# Altium PCB Base_Board.PcbDoc
Units mm, origin at the board's own origin, x right, y up, seen from the top; angles counter-clockwise.
Board outline 96 x 76 mm, 2 copper layers (Top Layer, Bottom Layer); 20 components, 36 nets, 144 pads, 18 vias.
Unrouted connection lines stored in the file: 24.
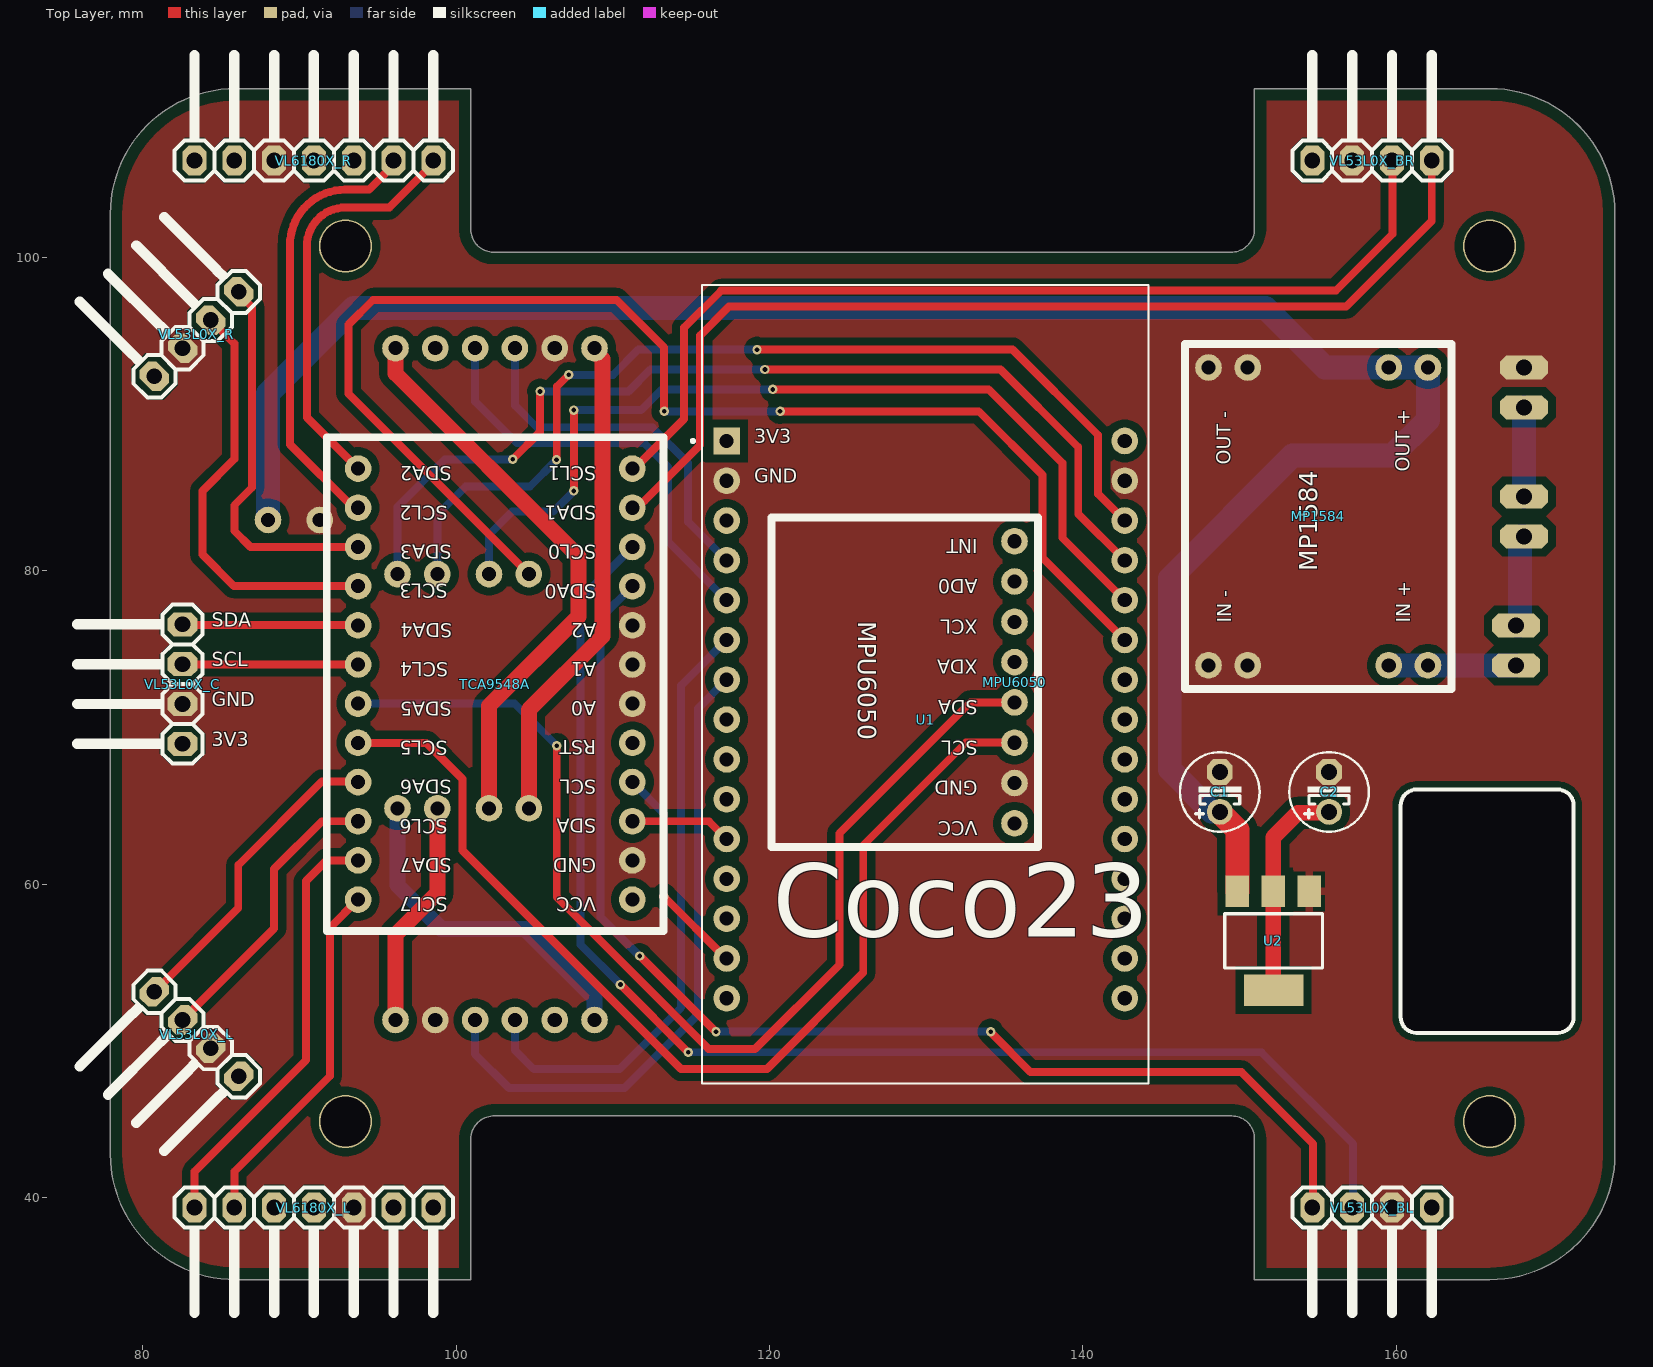
[diagram p0: Top Layer view]
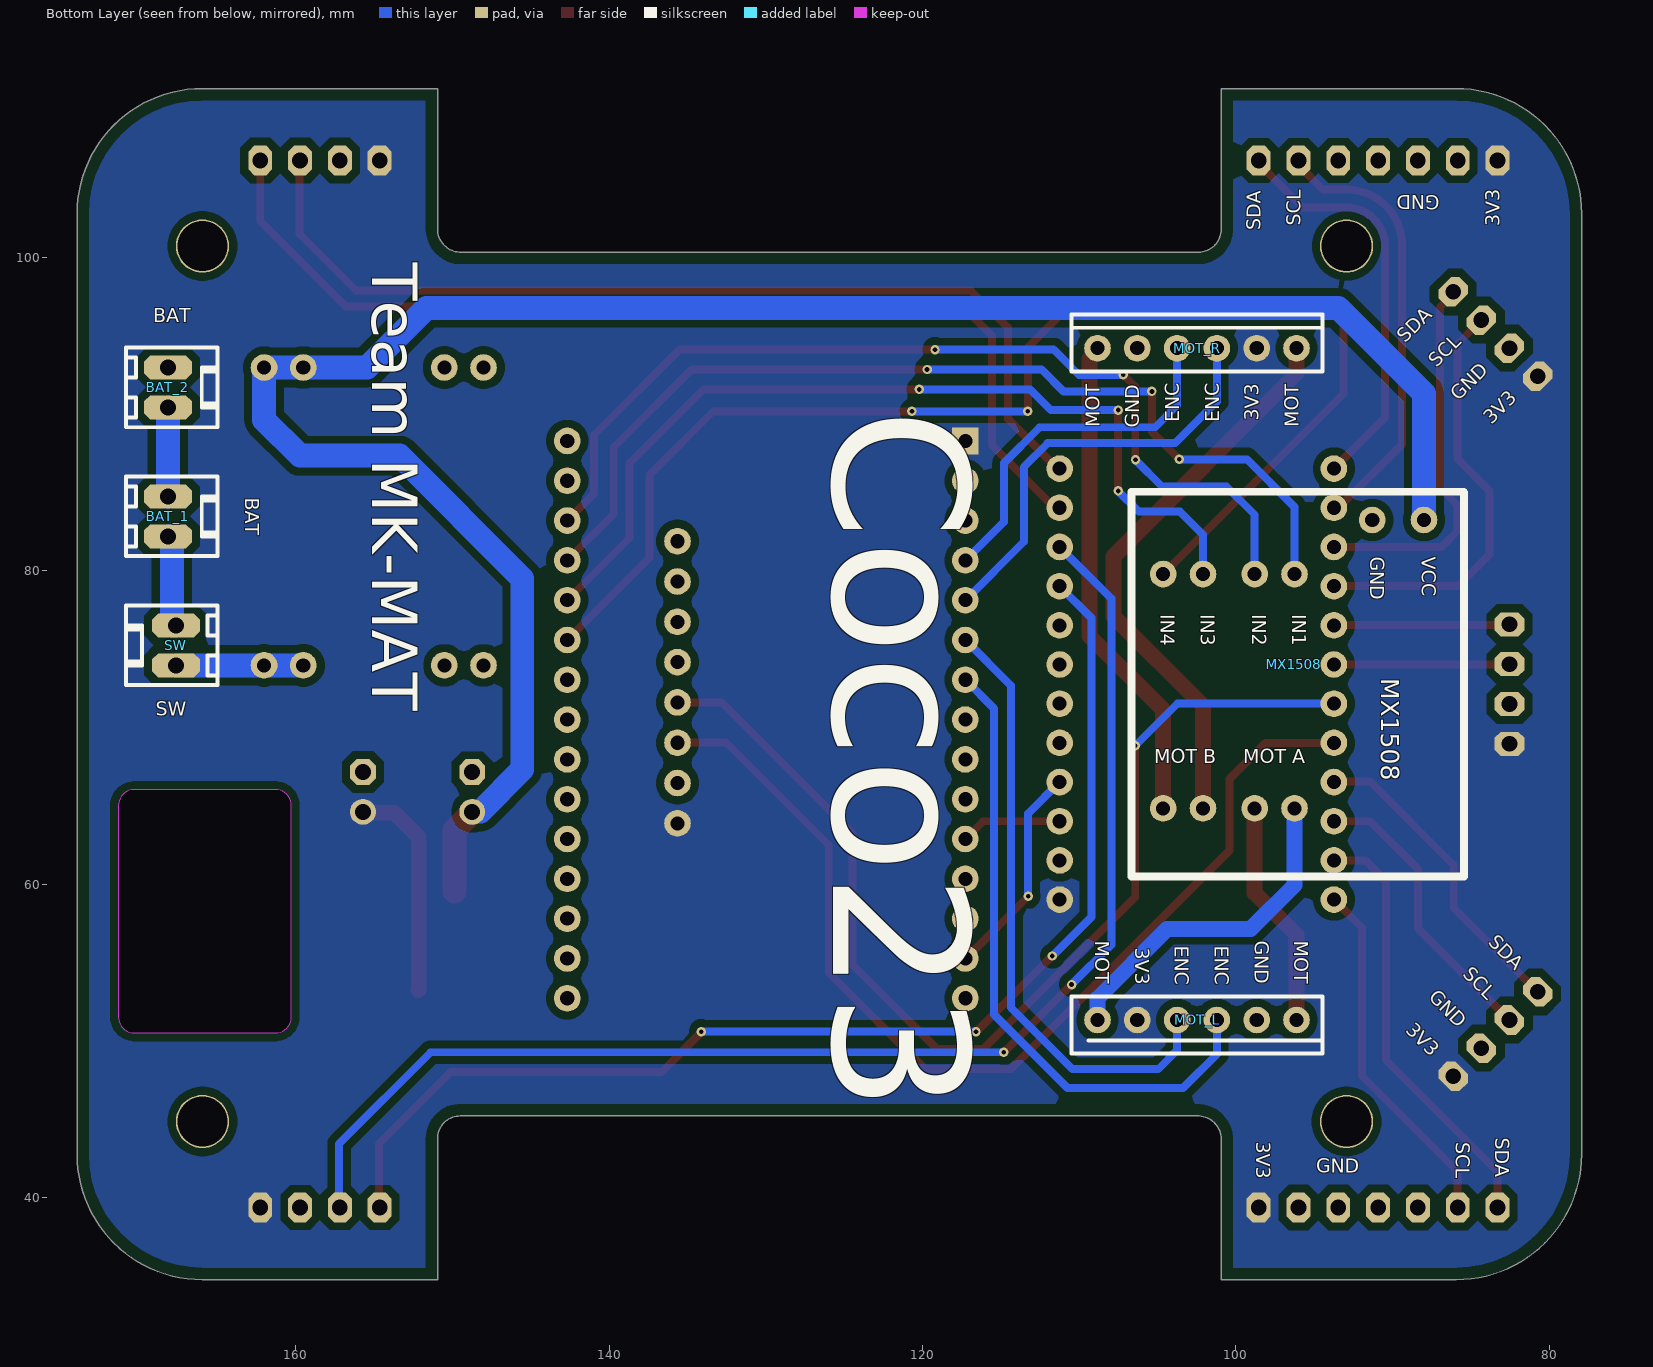
[diagram p1: Bottom Layer view, seen from below]
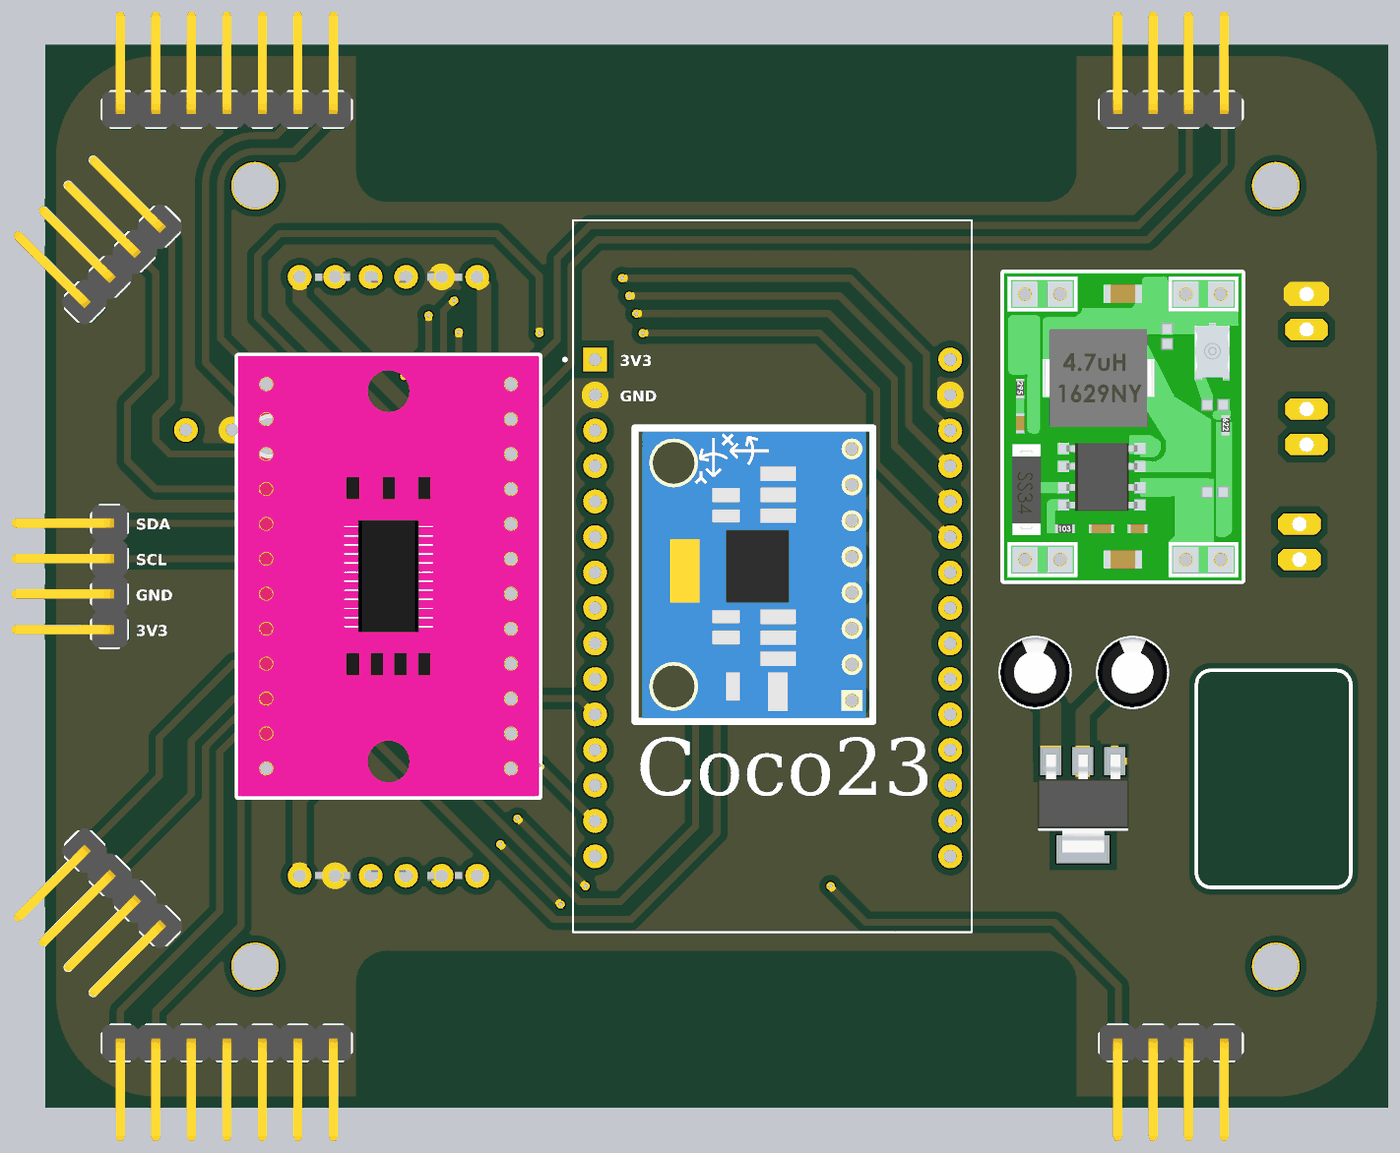
[diagram p2: 3D render of the assembled board from above, using the file's embedded part models]
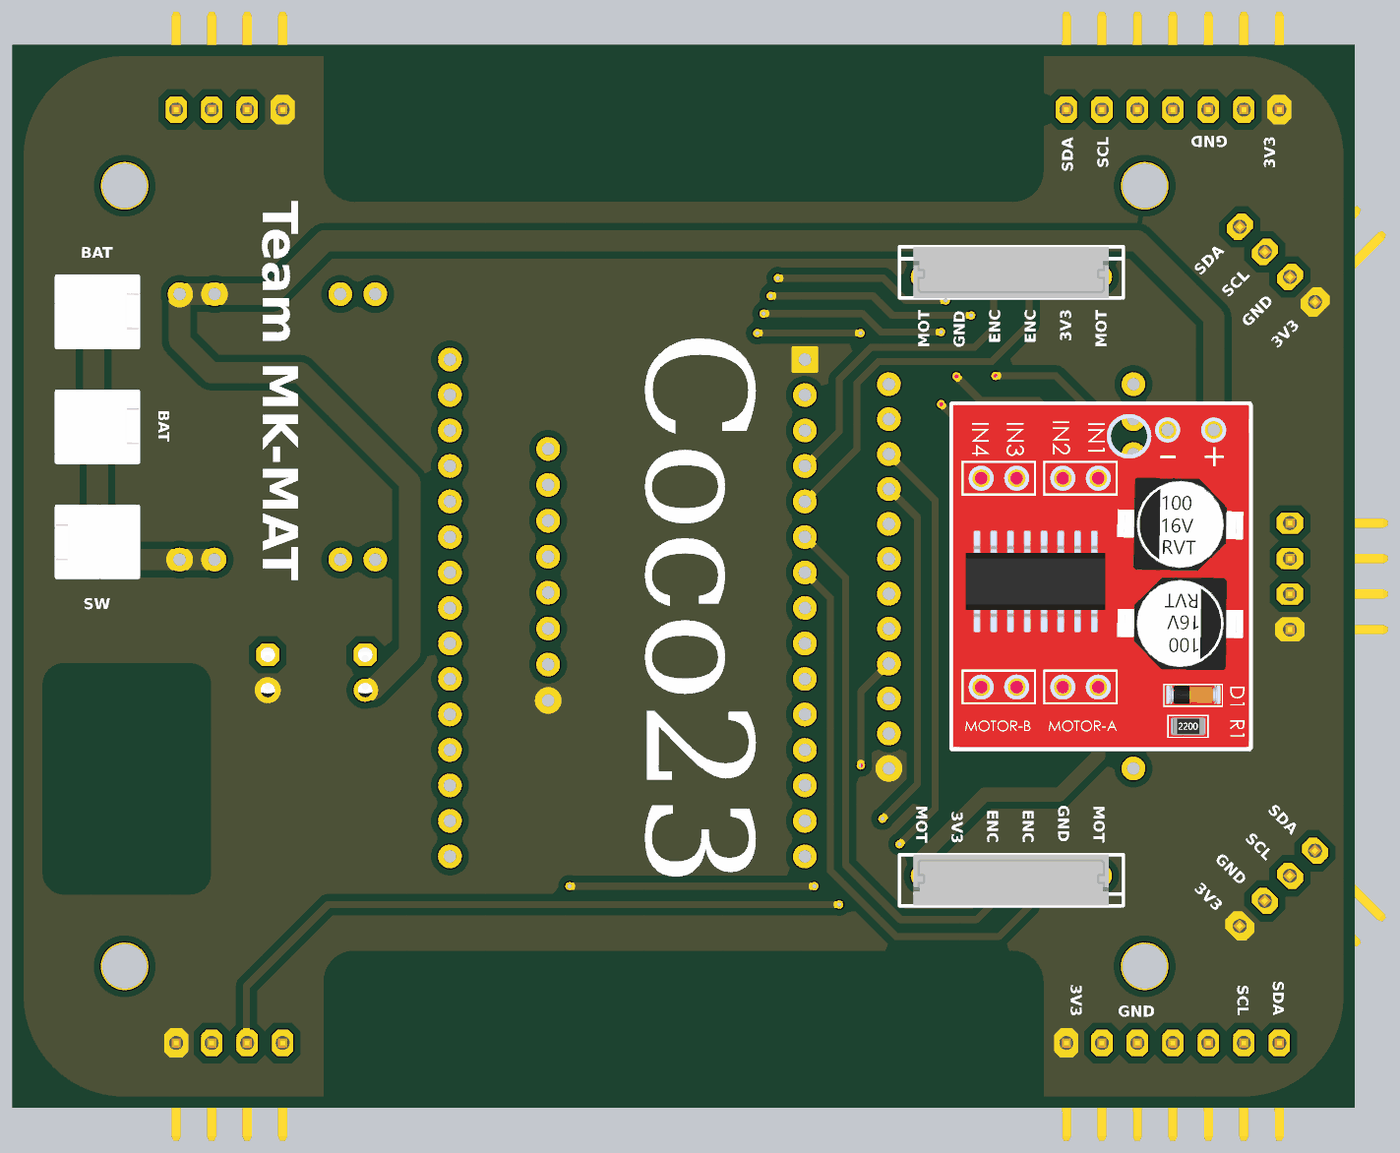
[diagram p3: 3D render of the assembled board from below, using the file's embedded part models]

## Layer stack, top to bottom
Top Solder: solder mask 0.0102, Solder Resist, Dk 3.5
Top Layer: signal copper 0.0356
Dielectric 1: dielectric 0.32, FR-4, Dk 4.8
Bottom Layer: signal copper 0.0356
Bottom Solder: solder mask 0.0102, Solder Resist, Dk 3.5

## Board outline
77.946,42.766 ccw(c85.946,42.766) 85.946,34.766 100.946,34.766 100.946,43.766 cw(c102.43,43.728) 102.468,45.212 149.5,45.212 cw(c149.5,43.766) 150.946,43.766 150.946,34.766 165.946,34.766 ccw(c165.946,42.766) 173.946,42.766 173.946,102.766 ccw(c165.946,102.766) 165.946,110.766 150.946,110.766 150.946,101.766 cw(c149.472,101.804) 149.434,100.33 102.382,100.33 cw(c102.382,101.766) 100.946,101.766 100.946,110.766 85.946,110.766 ccw(c85.946,102.766) 77.946,102.766
cut-out: 160.274,51.524 160.274,65.024 cw(c161.29,65.024) 161.29,66.04 170.29,66.04 cw(c170.29,65.024) 171.306,65.024 171.306,51.524 cw(c170.29,51.524) 170.29,50.508 161.29,50.508 cw(c161.29,51.524)
cut-out: 160.274,51.524 160.274,65.024 cw(c161.29,65.024) 161.29,66.04 170.29,66.04 cw(c170.29,65.024) 171.306,65.024 171.306,51.524 cw(c170.29,51.524) 170.29,50.508 161.29,50.508 cw(c161.29,51.524)

## Design rules (kind name [scope] priority, off if disabled: settings)
Clearance [All] p1: gap=0.508 ignorepadtopadclearanceinfootprint=TRUE
ComponentClearance [All] p1: gap=0.01 collisioncheckmode=3 verticalgap=2540 showdistances=FALSE
HoleSize [All] p1: absolutevalues=TRUE maxlimit=3.6 minlimit=0.025 maxpercent=80.000 minpercent=20.000
PolygonConnect [All] p1: thpad.connectstyle=Direct thpad.reliefconductorwidth=0.254 thpad.reliefentries=4 thpad.polygonreliefangle="90 Angle" thpad.airgapwidth=0.254 smdpad.connectstyle=Relief smdpad.reliefconductorwidth=0.508 smdpad.reliefentries=4 smdpad.polygonreliefangle="90 Angle" smdpad.airgapwidth=0.254 via.connectstyle=Direct via.reliefconductorwidth=0.254 via.reliefentries=4 via.polygonreliefangle="90 Angle" via.airgapwidth=0.254
RoutingVias [All] p1: holewidth=0.3 width=0.6 viastyle="Through Hole" minholewidth=0.3 minwidth=0.6 maxholewidth=0.3 maxwidth=0.6
SolderMaskExpansion [All] p1: expansion=0.102 istentingtop=FALSE
Width "Schematic Width Constraint_8" [InNet('MR-')] p1: maxlimit=1.016 minlimit=1.016 preferedwidth=1.016
Width "Schematic Width Constraint_7" [InNet('MR+')] p2: maxlimit=1.016 minlimit=1.016 preferedwidth=1.016
Width "Schematic Width Constraint_6" [InNet('ML-')] p3: maxlimit=1.016 minlimit=1.016 preferedwidth=1.016
Width "Schematic Width Constraint_5" [InNet('ML+')] p4: maxlimit=1.016 minlimit=1.016 preferedwidth=1.016
Width "Schematic Width Constraint_4" [InNet('NetMP1584_1')] p5: maxlimit=1.524 minlimit=1.524 preferedwidth=1.524
Width "Schematic Width Constraint_3" [InNet('NetBAT_1_2')] p6: maxlimit=1.524 minlimit=1.524 preferedwidth=1.524
Width "Schematic Width Constraint_2" [InNet('+7.4V')] p7: maxlimit=1.524 minlimit=1.524 preferedwidth=1.524
Width "Schematic Width Constraint_1" [InNet('+6V')] p8: maxlimit=1.524 minlimit=1.524 preferedwidth=1.524
Width "Schematic Width Constraint" [InNet('+3V3')] p9: maxlimit=1.016 minlimit=1.016 preferedwidth=1.016
Width [All] p10: maxlimit=0.508 minlimit=0.254 preferedwidth=0.508
28 further rules are at their usual default settings.

## Components (designator, comment, footprint, x,y, rotation, side; value= is the part's Value field where it differs from the comment)
BAT_1 "Header 2" MY_6410-02 168.148,83.464 r270 bottom
BAT_2 "Header 2" MY_6410-02 168.148,91.694 r270 bottom
C1 "10uF" MY_E2.5-5mm 148.733,65.887 r90 top
C2 "10uF" MY_E2.5-5mm 155.702,65.887 r90 top
MOT_L "Header 6" MY_53253-0670#1 107.502,51.334 r180 bottom
MOT_R "Header 6" MY_53253-0670#2 97.502,94.198 r0 bottom
MP1584 "MP1584 Mini Adjustable Buck" "MP1584 Mini Adjustable Buck-Footprint-1" 162.012,73.964 r90 top
MPU6050 "MPU6050 Accelerometer and Gyroscope Sensor" "MPU6050 Accelerometer and Gyroscope Sensor-Footprint-1" 135.636,63.882 r180 top
MX1508 "MX1508 Motor Driver" "MX1508 Motor Driver-Footprint-1" 96.266,79.787 r270 bottom
SW "Header 2" MY_6410-02 167.64,75.234 r90 bottom
TCA9548A "TCA9548A 1-to-8 I2C Multiplexer Module" "TCA9548A 1-to-8 I2C Multiplexer Module-Footprint-1" 111.252,59.016 r180 top
U1 "ESP32-DEVKIT-V1" MODULE_ESP32_DEVKIT_V1 129.966,72.766 r0 top
U2 "LM1117" MY_SOT223 152.175,56.319 r180 top
VL53L0X_BL "Header 4" MY_MA04-1W 158.446,39.37 r180 top
VL53L0X_BR "Header 4" MY_MA04-1W 158.446,106.172 r0 top
VL53L0X_C "Header 4" MY_MA04-1W 82.55,72.766 r90 top
VL53L0X_L "Header 4" MY_MA04-1W 83.448,50.436 r135 top
VL53L0X_R "Header 4" MY_MA04-1W 83.448,95.096 r45 top
VL6180X_L "Header 7" MY_MA07-1W 90.932,39.37 r180 top
VL6180X_R "Header 7" MY_MA07-1W 90.932,106.172 r0 top

## Footprints (in the part's own frame and the unit in brackets; to place one, negate y for a bottom-side part, rotate by r counter-clockwise, add the part's x,y. Pads: shape width x height; smd on the part's side, far side on the other; paste and mask are expansions set on the pad)
MODULE_ESP32_DEVKIT_V1 [mm]
  rect 1.7x1.7 hole 0.9: 1(-12.7,15.515)
  round 1.7 hole 0.9: 2(-12.7,12.975) 3(-12.7,10.435) 4(-12.7,7.895) 5(-12.7,5.355) 6(-12.7,2.815) 7(-12.7,0.275) 8(-12.7,-2.265) 9(-12.7,-4.805) 10(-12.7,-7.345) 11(-12.7,-9.885) 12(-12.7,-12.425) 13(-12.7,-14.965) 14(-12.7,-17.505) 15(-12.7,-20.045) 16(12.7,-20.045) 17(12.7,-17.505) 18(12.7,-14.965) 19(12.7,-12.425) 20(12.7,-9.885) 21(12.7,-7.345) 22(12.7,-4.805) 23(12.7,-2.265) 24(12.7,0.275) 25(12.7,2.815) 26(12.7,5.355) 27(12.7,7.895) 28(12.7,10.435) 29(12.7,12.975) 30(12.7,15.515)
  silkscreen extent -14.95,-25.48 14.23,25.48
"MP1584 Mini Adjustable Buck-Footprint-1" [mm]
  round 1.7 hole 0.9: 1(0,2.5) 1(0,0) 2(0,14) 2(0,11.5) 3(19,11.5) 3(19,14) 4(19,0) 4(19,2.5)
  silkscreen extent -1.5,-1.5 20.5,15.5, body extent -1.5,-1.5 20.5,15.5, height 3.6
"MPU6050 Accelerometer and Gyroscope Sensor-Footprint-1" [mm]
  round 1.7 hole 0.9: 1(0,0) 2(0,-2.571) 3(0,-5.143) 4(0,-7.714) 5(0,-10.286) 6(0,-12.857) 7(0,-15.429) 8(0,-18)
  silkscreen extent -1.5,-19.5 15.52,1.5, body extent -1,-19.25 15,1.25, height 3.2
"MX1508 Motor Driver-Footprint-1" [mm]
  round 1.7 hole 0.9: 1(-3.45,8.26) 2(-3.45,4.96) 3(0,0) 4(0,-2.54) 5(0,-5.84) 6(0,-8.38) 7(14.95,0) 8(14.95,-2.54) 9(14.95,-5.84) 10(14.95,-8.38)
  silkscreen extent -5.25,-10.41 19.29,10.8, body extent -5.25,-10.4 19.25,10.8, height 7.76
MY_6410-02 [mil]
  oct 60x120 hole 40: 1(50,0) 2(-50,0)
  silkscreen extent -100,-105 100,125, body extent -102,-102 99,126, height 449
MY_53253-0670#1 [mm]
  round 1.7 hole 0.9: 1(-1.335,0) 2(1.205,0) 3(3.745,0) 4(6.285,0) 5(8.825,0) 6(11.365,0)
  silkscreen extent -2.99,-2.15 13.01,1.5, body extent -2,-2.12 12,1.53, height 5.55
MY_53253-0670#2 [mm]
  round 1.7 hole 0.9: 1(-1.365,0) 2(1.175,0) 3(3.715,0) 4(6.255,0) 5(8.795,0) 6(11.335,0)
  silkscreen extent -3.01,-2.15 12.99,1.5, body extent -2,-2.12 12,1.53, height 5.55
MY_E2.5-5mm [mil]
  round 65 hole 40: +(-50,0)
  oct 65x65 hole 40: -(50,0)
  silkscreen extent -100,-100 100,100, body extent -98,-98 98,98, height 395
MY_MA04-1W [mm]
  oct 1.524x1.905 hole 1: 1(-3.81,0) 2(-1.27,0) 3(1.27,0) 4(3.81,0)
  silkscreen extent -5.08,-1.27 5.08,6.73, body extent -5.08,-1.27 5.08,7, height 4.33
MY_MA07-1W [mm]
  oct 1.524x1.905 hole 1: 1(-7.62,0) 2(-5.08,0) 3(-2.54,0) 4(0,0) 5(2.54,0) 6(5.08,0) 7(7.62,0)
  silkscreen extent -8.89,-1.27 8.89,6.73, body extent -8.89,-1.27 8.89,7, height 4.33
MY_SOT223 [mil]
  rect 59x79 smd: 1(-88.65,-126.69) 2(1.35,-126.69) 3(91.35,-126.69)
  rect 150x79 smd: 2(0.35,121.31)
  silkscreen extent -123,-71 123,65, body extent -128,-145 128,131, height 66
"TCA9548A 1-to-8 I2C Multiplexer Module-Footprint-1" [mm]
  round 1.7 hole 0.9: 1(0,0) 2(0,-2.5) 3(0,-5) 4(0,-7.5) 5(0,-10) 6(0,-12.5) 7(0,-15) 8(0,-17.5) 9(0,-20) 10(0,-22.5) 11(0,-25) 12(0,-27.5) 13(17.5,-27.5) 14(17.5,-25) 15(17.5,-22.5) 16(17.5,-20) 17(17.5,-17.5) 18(17.5,-15) 19(17.5,-12.5) 20(17.5,-10) 21(17.5,-7.5) 22(17.5,-5) 23(17.5,-2.5) 24(17.5,0)
  silkscreen extent -2,-29.5 19.5,2, body extent -2,-29.5 19.5,2, height 2.6

## Part data
BAT_1 BAT_2 SW: "Header, 2-Pin", ASiD Part Number="Header 2-AS"
C1 C2: library part "Cap Pol", "Polar capacitor", ASiD Part Number=C-AS, Volte=25v
MOT_L MOT_R: "Header, 6-Pin", ASiD Part Number="Header 6-AS"
MP1584: library part RBT-0002-2, "MP1584 Mini Adjustable DC-DC Step Down Module can step-down a 4.5 to 28V input voltage to a 0.8 to 20V output at up to 2A."
MPU6050: library part RBT-0003-2, "MPU6050 sensor module is complete 6-axis Motion Tracking Device. It combines 3-axis Gyroscope, 3-axis Accelerometer and Digital Motion Processor all in small package."
MX1508: library part RBT-0001-2, "MX1508 Dual H Bridge DC PWM Stepper Motor Driver module."
TCA9548A: library part RBT-0004-4, "An 8-channel I2C multiplexer which is useful to allow multiple I2C devices with the same address to share a single I2C bus."
U1: "Dual core, Wi-Fi: 2.4 GHz up to 150 Mbits/s,BLE (Bluetooth Low Energy) and legacy Bluetooth, 32 bits, Up to 240 MHz", Package=None, Availability=Unavailable, MF="{'manufacturer': u'Do it'}", MP=ESP32-DEVKIT-V1, Price=None
U2: "Low Drop Voltage Reg", ASiD Part Number=LM1117-AS
VL53L0X_BL VL53L0X_BR VL53L0X_C VL53L0X_L VL53L0X_R: "Header, 4-Pin", ASiD Part Number="Header 4-AS"
VL6180X_L VL6180X_R: "Header, 8-Pin, Dual row", ASiD Part Number="Header 7-AS"

## Free pads (board coordinates)
  round 3.4 hole 3.2: M1(92.946,100.714) M2(92.946,44.856) M3(165.946,100.714) M4(165.946,44.856)

## Via types
v1: diameter 0.6, hole 0.3, Top Layer to Bottom Layer, 18 vias

## Nets (pads, with @x,y where several pads share a name; then routed paths per layer and width w, separated by ;. In a path a pad name is that pad's centre, name@x,y a point inside that pad or via, vN(x,y) a via of type N, cw(c..) or ccw(c..) an arc to the next point about the centre after c; other vN are vias at no path point)
+3V3: C2.+ MOT_L.2 MOT_R.2 MPU6050.1 TCA9548A.1 U1.1 U2.2 VL53L0X_BL.1 VL53L0X_BR.1 VL53L0X_C.1 VL53L0X_L.1 VL53L0X_R.1 VL6180X_L.1 VL6180X_R.1 | length 14
  Top Layer w1.016: U2.2@152.167,53.238 152.141,53.263 152.141,59.537 152.141,62.987 153.71,64.556 155.641,64.556 C2.+
+6V: C1.+ MP1584.4 MX1508.1 U2.3 | length 131.9
  Top Layer w1.524: C1.+@148.733,64.583 149.855,63.46 U2.3
  Bottom Layer w1.524: MX1508.1 88.006,91.308 93.472,96.774 151.638,96.774 155.448,92.964 159.512,92.964 162.012,92.964 162.012,89.622 159.732,87.342 153.382,87.342 145.542,79.502 145.542,67.313 148.214,64.641 148.674,64.641 C1.+@148.698,64.617 ; C1.+@148.733,64.583 C1.+
+7.4V: BAT_1.1 SW.1 | length 6.2
  Bottom Layer w1.524: SW.1 167.894,76.504 167.894,82.194 BAT_1.1
D12: MX1508.3 U1.27 | length 63.4
  Top Layer w0.508: v1(103.62,87.11) 105.364,88.854 v1(105.364,91.44) ; v1(119.71,92.837) 134.747,92.837 139.7,87.884 139.7,83.627 U1.27
  Bottom Layer w0.508: MX1508.3 96.266,84.074 99.302,87.11 v1(103.62,87.11) ; v1(105.364,91.44) 110.998,91.44 112.395,92.837 v1(119.71,92.837)
D13: MX1508.4 U1.28 | length 61.5
  Top Layer w0.508: v1(106.413,87.075) 106.426,87.088 106.426,91.74 v1(107.188,92.502) ; v1(119.202,94.107) 135.509,94.107 140.97,88.646 140.97,84.897 U1.28
  Bottom Layer w0.508: MX1508.4 98.806,83.566 100.601,85.361 104.711,85.361 106.413,87.063 v1(106.413,87.075) ; v1(107.188,92.502) 110.028,92.502 111.633,94.107 v1(119.202,94.107)
D14: MX1508.5 U1.26 | length 58.3
  Top Layer w0.508: v1(107.521,85.09) v1(107.521,90.249) ; v1(120.218,91.567) 133.985,91.567 138.684,86.868 138.684,82.103 U1.26
  Bottom Layer w0.508: MX1508.5 102.106,82.294 103.576,83.764 106.195,83.764 v1(107.521,85.09) ; v1(107.521,90.249) 111.815,90.249 113.133,91.567 v1(120.218,91.567)
D27: MX1508.6 U1.25 | length 85.4
  Top Layer w0.508: MX1508.6 93.142,91.292 93.142,95.707 94.717,97.282 110.236,97.282 113.284,94.234 v1(113.284,90.17) ; v1(120.675,90.17) 133.35,90.17 137.414,86.106 137.414,80.833 U1.25
  Bottom Layer w0.508: MX1508.6 MX1508.6@104.679,79.787 ; v1(113.284,90.17) v1(120.675,90.17)
ENC_LA: MOT_L.3 U1.6 | length 39.3
  Bottom Layer w0.508: MOT_L.3 103.757,49.405 104.964,48.198 110.428,48.198 114.351,52.121 114.351,72.665 U1.6
ENC_LB: MOT_L.4 U1.7 | length 41.4
  Bottom Layer w0.508: MOT_L.4 101.217,49.151 103.378,46.99 110.744,46.99 115.443,51.689 115.443,71.218 U1.7
ENC_RA: MOT_R.3 U1.5 | length 27.5
  Bottom Layer w0.508: MOT_R.3 101.217,90.807 103.886,88.138 112.014,88.138 113.538,86.614 113.538,81.849 U1.5
ENC_RB: MOT_R.4 U1.4 | length 23.4
  Bottom Layer w0.508: MOT_R.4 103.757,90.553 105.156,89.154 112.522,89.154 114.808,86.868 114.808,83.119 U1.4
GND: BAT_2.2 C1.- C2.- MOT_L.5 MOT_R.5 MP1584.2 MP1584.3 MPU6050.2 MX1508.2 TCA9548A.2 TCA9548A.6 TCA9548A.7 TCA9548A.8 U1.2 U1.29 U2.1 VL53L0X_BL.2 VL53L0X_BR.2 VL53L0X_C.2 VL53L0X_L.2 VL53L0X_R.2 VL6180X_L.3 VL6180X_R.3
ML+: MOT_L.1 MX1508.7 | length 21.8
  Bottom Layer w1.016: MX1508.7 96.266,59.944 99.06,57.15 104.394,57.15 108.837,52.707 MOT_L.1
ML-: MOT_L.6 MX1508.8 | length 14.6
  Top Layer w1.016: MOT_L.6 96.137,56.767 98.806,59.436 MX1508.8
MR+: MOT_R.1 MX1508.9 | length 36.5
  Top Layer w1.016: MOT_R.1 96.137,92.585 107.823,80.899 107.823,77.089 102.106,71.372 MX1508.9@102.106,64.936
MR-: MOT_R.6 MX1508.10 | length 31.5
  Top Layer w1.016: MX1508.10 104.646,71.118 109.347,75.819 109.347,93.503 108.837,94.013 MOT_R.6
NetBAT_1_2: BAT_1.2 BAT_2.1 | length 5.7
  Bottom Layer w1.524: BAT_1.2 BAT_2.1
NetMP1584_1: MP1584.1 SW.2 | length 8.1
  Bottom Layer w1.524: MP1584.1@159.512,73.964 162.012,73.964 SW.2
SCL: TCA9548A.4 U1.14 | length 13.7
  Top Layer w0.508: v1(113.259,59.233) U1.14@117.23,55.261
  Bottom Layer w0.508: TCA9548A.4 113.259,64.509 v1(113.259,59.233)
SCL0: TCA9548A.10 VL53L0X_BL.3 | length 85.3
  Top Layer w0.508: v1(110.49,53.594) v1(114.808,49.276)
  Bottom Layer w0.508: v1(110.49,53.594) 107.95,56.134 107.95,78.214 TCA9548A.10 ; v1@114.833,49.276 151.384,49.276 157.226,43.434 157.226,39.42 VL53L0X_BL.3
SCL1: TCA9548A.12 VL53L0X_BR.3 | length 62.8
  Top Layer w0.508: TCA9548A.12 111.386,86.516 114.554,89.684 114.554,95.504 116.916,97.866 156.134,97.866 159.766,101.498 159.766,106.122 VL53L0X_BR.3
SCL2: TCA9548A.14 VL6180X_R.6 | length 28.3
  Top Layer w0.508: TCA9548A.14 93.454,84.016 89.408,88.062 89.408,100.777 cw(c92.926,100.793) 92.926,104.311 94.444,104.311 96.012,105.878 VL6180X_R.6
SCL3: TCA9548A.16 VL53L0X_R.3 | length 27.2
  Top Layer w0.508: VL53L0X_R.3 85.852,94.488 85.852,87.122 83.82,85.09 83.82,81.026 85.83,79.016 TCA9548A.16
SCL4: TCA9548A.18 VL53L0X_C.3 | length 11.2
  Top Layer w0.508: VL53L0X_C.3 82.56,74.026 93.742,74.026 TCA9548A.18
SCL5: MPU6050.3 TCA9548A.20 | length 66.6
  Top Layer w0.508: TCA9548A.20 98.116,69.016 100.418,66.714 100.418,62.142 114.346,48.214 119.842,48.214 125.984,54.356 125.984,62.484 132.525,69.025 MPU6050.3
SCL6: TCA9548A.22 VL53L0X_L.3 | length 18.7
  Top Layer w0.508: VL53L0X_L.3 88.392,57.176 88.392,60.96 91.448,64.016 TCA9548A.22
SCL7: TCA9548A.24 VL6180X_L.6 | length 22.9
  Top Layer w0.508: VL6180X_L.6 85.852,41.656 91.948,47.752 91.948,57.212 TCA9548A.24
SDA: TCA9548A.3 U1.11 | length 6.5
  Top Layer w0.508: TCA9548A.3@111.262,64.016 116.131,64.016 U1.11
SDA0: TCA9548A.9 VL53L0X_BL.4 | length 77.5
  Top Layer w0.508: v1(111.714,55.418) 111.737,55.418 116.563,50.592 v1(116.586,50.592) ; v1@134.114,50.592 134.114,50.565 134.158,50.521 134.158,50.502 136.654,48.006 150.114,48.006 154.686,43.434 154.686,39.42 VL53L0X_BL.4
  Bottom Layer w0.508: TCA9548A.9 109.22,76.984 109.22,57.912 v1(111.714,55.418) ; v1@116.611,50.592 v1(134.112,50.592)
SDA1: TCA9548A.11 VL53L0X_BR.4 | length 66.5
  Top Layer w0.508: TCA9548A.11 111.575,84.016 112.045,84.486 ; 112.045,84.486 115.57,88.011 115.57,94.996 117.424,96.85 156.794,96.85 162.256,102.312 VL53L0X_BR.4
SDA2: TCA9548A.13 VL6180X_R.7 | length 26.4
  Top Layer w0.508: TCA9548A.13 90.484,89.784 90.484,100.714 cw(c92.946,100.714) 92.946,103.176 95.746,103.176 98.552,105.981 VL6180X_R.7
SDA3: TCA9548A.15 VL53L0X_R.4 | length 24.4
  Top Layer w0.508: VL53L0X_R.4 86.142,97.656 86.995,96.803 86.995,85.319 85.852,84.176 85.852,82.55 86.886,81.516 TCA9548A.15
SDA4: TCA9548A.17 VL53L0X_C.4 | length 11.2
  Top Layer w0.508: VL53L0X_C.4 82.58,76.546 93.722,76.546 TCA9548A.17
SDA5: MPU6050.4 TCA9548A.19 | length 70.7
  Top Layer w0.508: v1(106.426,68.834) 106.426,59.182 116.124,49.484 119.08,49.484 124.46,54.864 124.46,63.246 132.811,71.597 MPU6050.4
  Bottom Layer w0.508: TCA9548A.19 103.744,71.516 v1(106.426,68.834)
SDA6: TCA9548A.21 VL53L0X_L.4 | length 20.2
  Top Layer w0.508: VL53L0X_L.4 86.106,58.482 86.106,61.214 91.44,66.548 93.72,66.548 TCA9548A.21
SDA7: TCA9548A.23 VL6180X_L.7 | length 27.6
  Top Layer w0.508: VL6180X_L.7 83.312,41.656 90.424,48.768 90.424,60.198 91.742,61.516 TCA9548A.23
pads on no net: MPU6050.5 MPU6050.6 MPU6050.7 MPU6050.8 TCA9548A.5 U1.3 U1.8 U1.9 U1.10 U1.12 U1.13 U1.15 U1.16 U1.17 U1.18 U1.19 U1.20 U1.21 U1.22 U1.23 U1.24 U1.30 VL6180X_L.2 VL6180X_L.4 VL6180X_L.5 VL6180X_R.2 VL6180X_R.4 VL6180X_R.5

## Polygon pours and split planes (outlines as drawn)
+3V3 on Bottom Layer "+3V3_L02_P001" (solid, remove dead copper, pour order 1): 77.946,42.766 ccw(c85.946,42.766) 85.946,34.766 100.946,34.766 100.946,43.69 102.468,45.212 149.5,45.212 150.946,43.766 150.946,34.766 165.946,34.766 ccw(c165.946,42.766) 173.946,42.766 173.946,102.766 ccw(c165.946,102.766) 165.946,110.766 150.946,110.766 150.946,101.842 149.434,100.33 102.382,100.33 100.946,101.766 100.946,110.766 85.946,110.766 ccw(c85.946,102.766) 77.946,102.766
GND on Top Layer "GND_L01_P002" (solid, remove dead copper, pour order 2): 77.946,42.766 ccw(c85.946,42.766) 85.946,34.766 100.946,34.766 100.946,43.69 102.468,45.212 149.5,45.212 150.946,43.766 150.946,34.766 165.946,34.766 ccw(c165.946,42.766) 173.946,42.766 173.946,102.766 ccw(c165.946,102.766) 165.946,110.766 150.946,110.766 150.946,101.842 149.434,100.33 102.382,100.33 100.946,101.766 100.946,110.766 85.946,110.766 ccw(c85.946,102.766) 77.946,102.766

## Silkscreen, mask and mechanical layers (free items; w line width, h text height)
Top Overlay:
  lines w0.254: 160.274,51.524 ccw(c161.29,51.524) 161.29,50.508 170.29,50.508 ccw(c170.29,51.524) 171.306,51.524 171.306,65.024 ccw(c170.29,65.024) 170.29,66.04 161.29,66.04 ccw(c161.29,65.024) 160.274,65.024 160.274,51.524
  text "3V3" at 119.036,87.822 h1.52
  text "GND" at 119.036,85.284 h1.52
  text "SDA" at 84.422,76.117 h1.52
  text "SCL" at 84.422,73.578 h1.52
  text "GND" at 84.422,71.039 h1.52
  text "3V3" at 84.422,68.497 h1.52
  text "Coco23" at 120.196,55.122 h8
Bottom Overlay:
  text "GND" at 86.999,104.28 h1.52 r180
  text "SCL" at 95.554,101.996 h1.52 r270
  text "3V3" at 82.853,101.964 h1.52 r270
  text "SDA" at 98.093,101.722 h1.52 r270
  text "Team MK-MAT" at 156.074,99.642 h5 r90
  text "BAT" at 169.097,95.55 h1.52
  text "SDA" at 88.963,94.264 h1.52 r315
  text "SCL" at 86.983,92.69 h1.52 r315
  text "GND" at 85.561,90.557 h1.52 r315
  text "Coco23" at 128.568,90.378 h15 r90
  text "3V3" at 98.218,89.584 h1.52 r270
  text "ENC" at 100.759,89.465 h1.52 r270
  text "ENC" at 103.299,89.465 h1.52 r270
  text "MOT" at 95.678,89.146 h1.52 r270
  text "MOT" at 108.378,89.146 h1.52 r270
  text "GND" at 105.84,89.133 h1.52 r270
  text "3V3" at 83.453,89.059 h1.52 r315
  text "BAT" at 163.53,84.667 h1.52 r90
  text "SW" at 168.91,70.421 h1.52
  text "MOT" at 96.596,56.386 h1.52 r90
  text "GND" at 99.134,56.399 h1.52 r90
  text "MOT" at 109.296,56.386 h1.52 r90
  text "ENC" at 101.675,56.067 h1.52 r90
  text "ENC" at 104.215,56.067 h1.52 r90
  text "SDA" at 84.197,55.994 h1.52 r45
  text "3V3" at 106.756,55.948 h1.52 r90
  text "SCL" at 85.821,53.963 h1.52 r45
  text "GND" at 87.979,52.49 h1.52 r45
  text "3V3" at 89.452,50.382 h1.52 r45
  text "SDA" at 83.771,43.82 h1.52 r90
  text "3V3" at 99.011,43.578 h1.52 r90
  text "SCL" at 86.31,43.546 h1.52 r90
  text "GND" at 94.865,41.262 h1.52

## Text inside footprints (layer, text, board x,y; h text height)
MP1584: Top Overlay "IN +" at 161.204,76.677 h1.52 r90; Top Overlay "IN -" at 149.774,76.677 h1.52 r90; Top Overlay "OUT -" at 149.754,86.765 h1.52 r90; Top Overlay "OUT +" at 161.184,86.329 h1.52 r90
MPU6050: Top Overlay "VCC" at 133.304,64.34 h1.52 r180; Top Overlay "GND" at 133.304,66.911 h1.52 r180; Top Overlay "SCL" at 133.304,69.483 h1.52 r180; Top Overlay "SDA" at 133.304,72.055 h1.52 r180; Top Overlay "XDA" at 133.304,74.627 h1.52 r180; Top Overlay "XCL" at 133.304,77.198 h1.52 r180; Top Overlay "AD0" at 133.304,79.77 h1.52 r180; Top Overlay "INT" at 133.304,82.341 h1.52 r180
MX1508: Bottom Overlay "GND" at 91.763,80.884 h1.52 r90; Bottom Overlay "IN1" at 96.726,77.213 h1.52 r90; Bottom Overlay "IN2" at 99.273,77.213 h1.52 r90; Bottom Overlay "IN3" at 102.565,77.213 h1.52 r90; Bottom Overlay "IN4" at 105.103,77.213 h1.52 r90; Bottom Overlay "VCC" at 88.464,80.884 h1.52 r90; Bottom Overlay "MOT A" at 99.522,67.407 h1.52; Bottom Overlay "MOT B" at 105.21,67.407 h1.52
TCA9548A: Top Overlay "GND" at 108.952,61.979 h1.52 r180; Top Overlay "SDA" at 108.952,64.482 h1.52 r180; Top Overlay "SCL" at 108.952,66.986 h1.52 r180; Top Overlay "RST" at 108.952,69.488 h1.52 r180; Top Overlay "A0" at 108.952,71.996 h1.52 r180; Top Overlay "A1" at 108.952,74.466 h1.52 r180; Top Overlay "A2" at 108.952,76.952 h1.52 r180; Top Overlay "SDA0" at 108.952,79.46 h1.52 r180; Top Overlay "SCL0" at 108.952,81.968 h1.52 r180; Top Overlay "SDA1" at 108.952,84.47 h1.52 r180; Top Overlay "SCL1" at 108.952,86.974 h1.52 r180; Top Overlay "SDA7" at 99.721,61.972 h1.52 r180; Top Overlay "SCL6" at 99.479,64.472 h1.52 r180; Top Overlay "SDA6" at 99.735,66.973 h1.52 r180; Top Overlay "SCL5" at 99.463,69.474 h1.52 r180; Top Overlay "SDA5" at 99.72,71.974 h1.52 r180; Top Overlay "SCL4" at 99.495,74.473 h1.52 r180; Top Overlay "SDA4" at 99.752,76.971 h1.52 r180; Top Overlay "SCL3" at 99.462,79.475 h1.52 r180; Top Overlay "SDA3" at 99.718,81.978 h1.52 r180; Top Overlay "SCL2" at 99.484,84.477 h1.52 r180; Top Overlay "SDA2" at 99.741,86.975 h1.52 r180; Top Overlay "SCL7" at 99.464,59.474 h1.52 r180; Top Overlay "VCC" at 108.952,59.474 h1.52 r180